# Altium PCB PCB.PcbDoc
Units mil, origin at the board's own origin, x right, y up, seen from the top; angles counter-clockwise.
Board outline 1900 x 1500 mil, 4 copper layers (Top Layer, Int1 (GND), Int2 (PWR), Bottom Layer), stack 62.449 mil thick; 52 components, 43 nets, 228 pads, 155 vias.
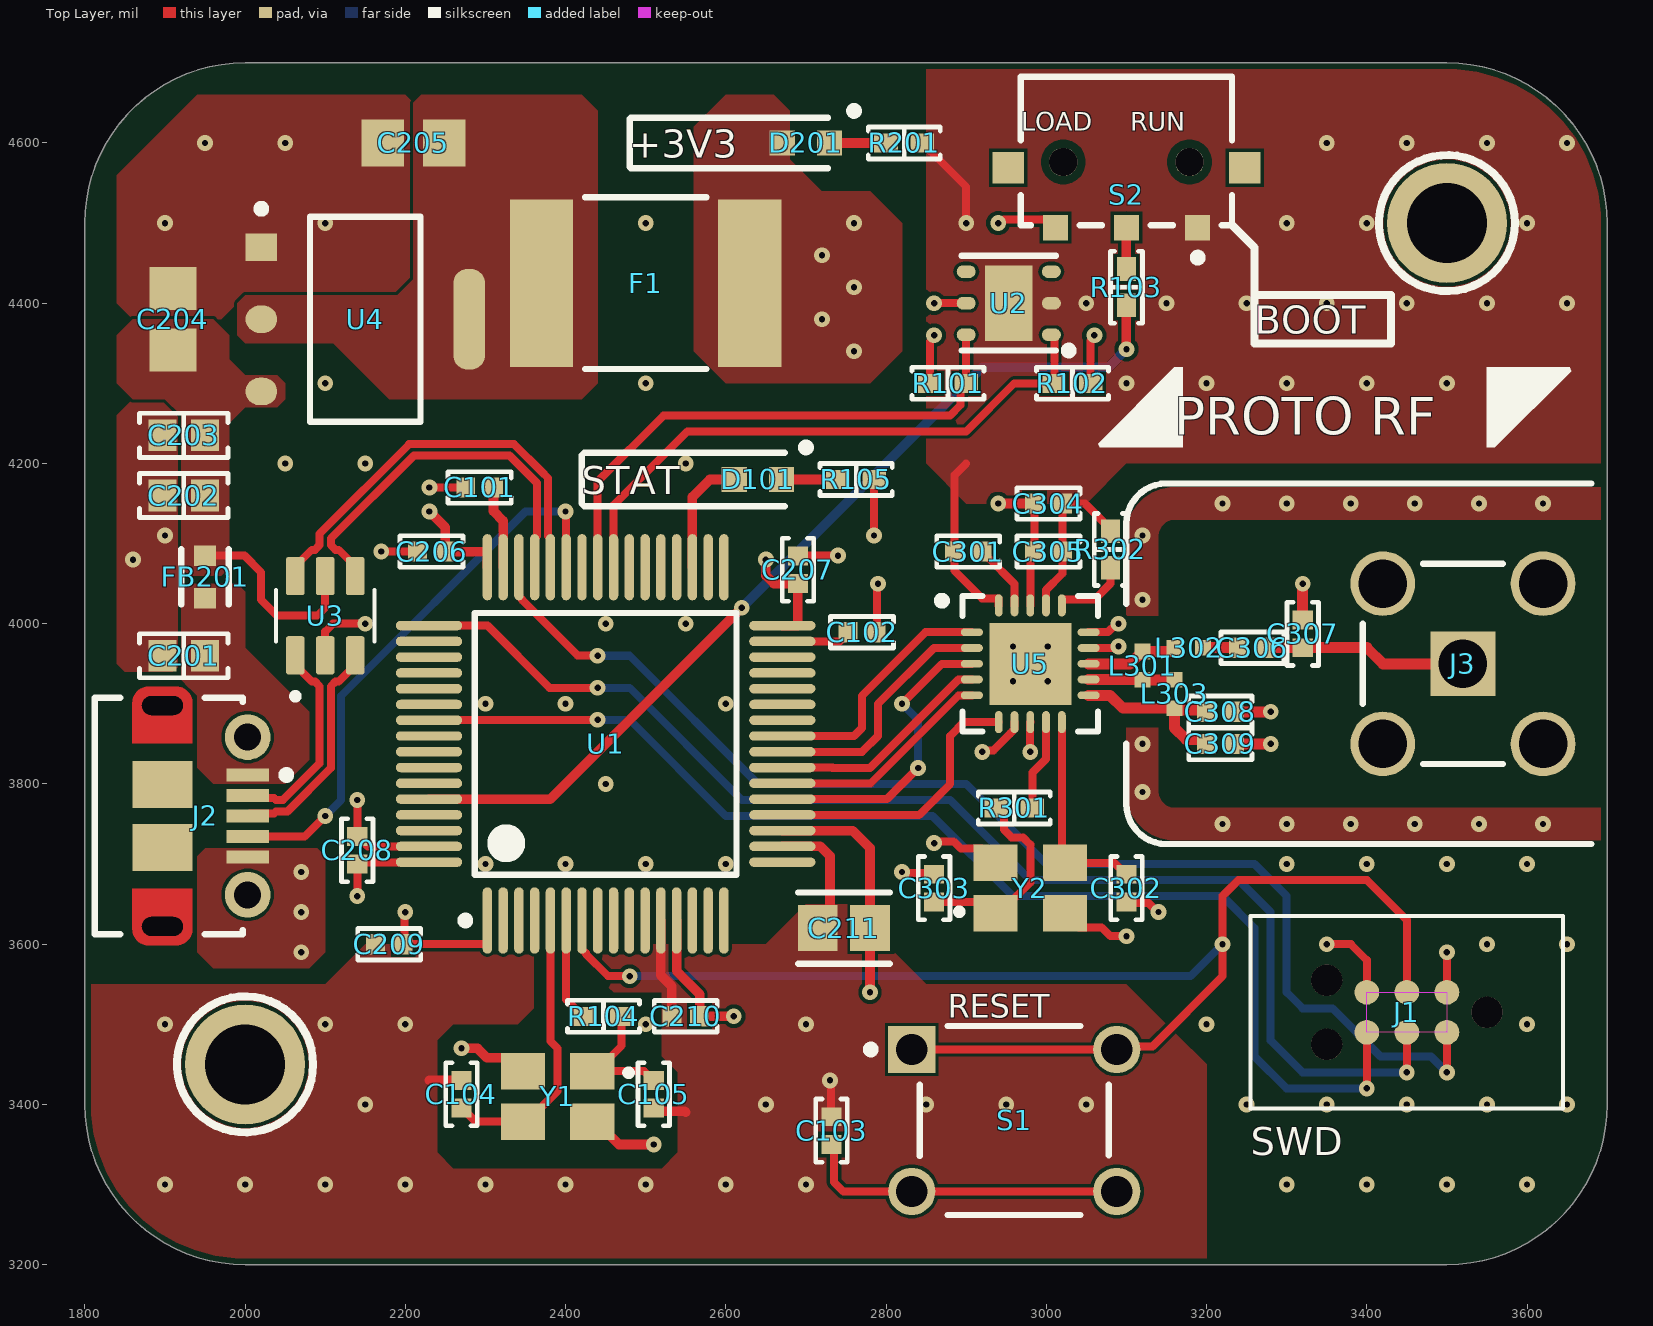
[diagram p0: Top Layer view]
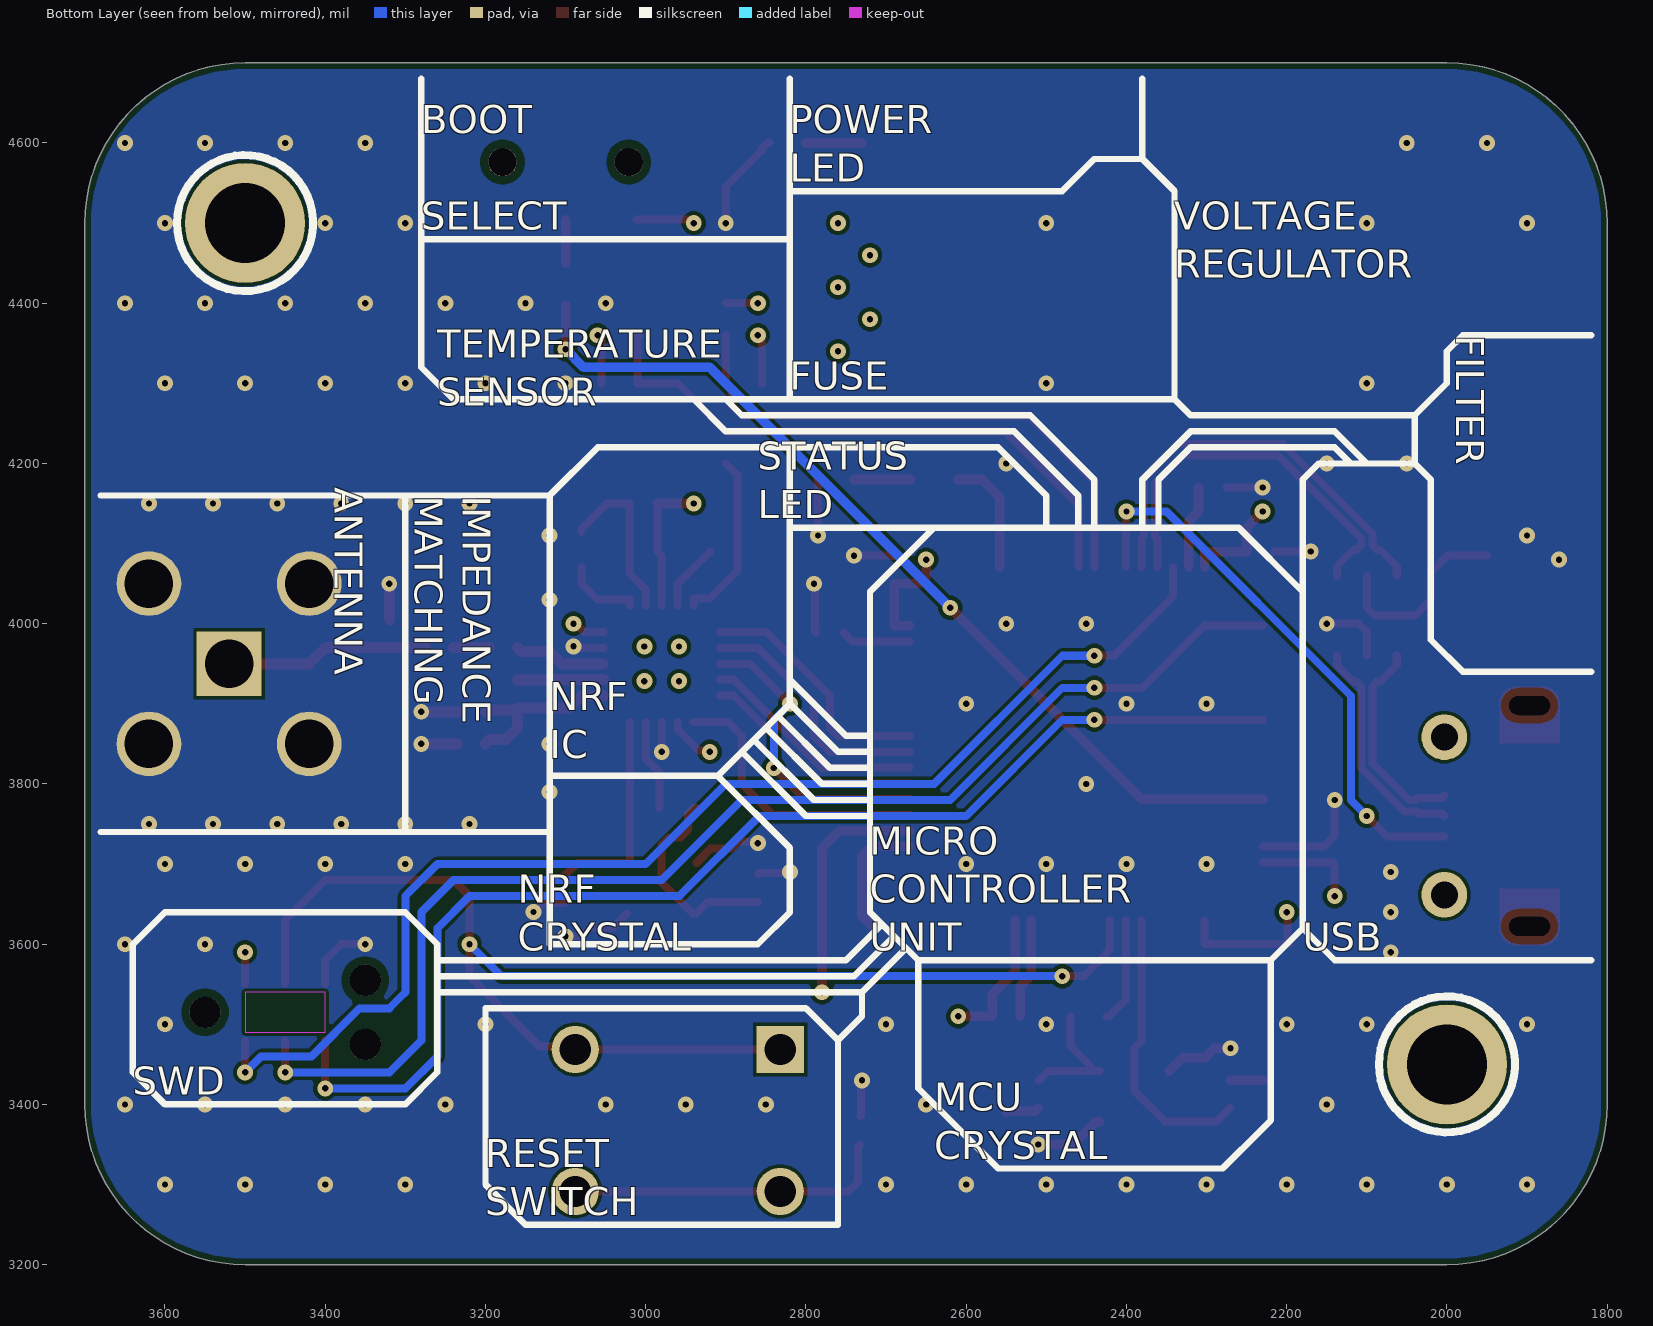
[diagram p1: Bottom Layer view, seen from below]
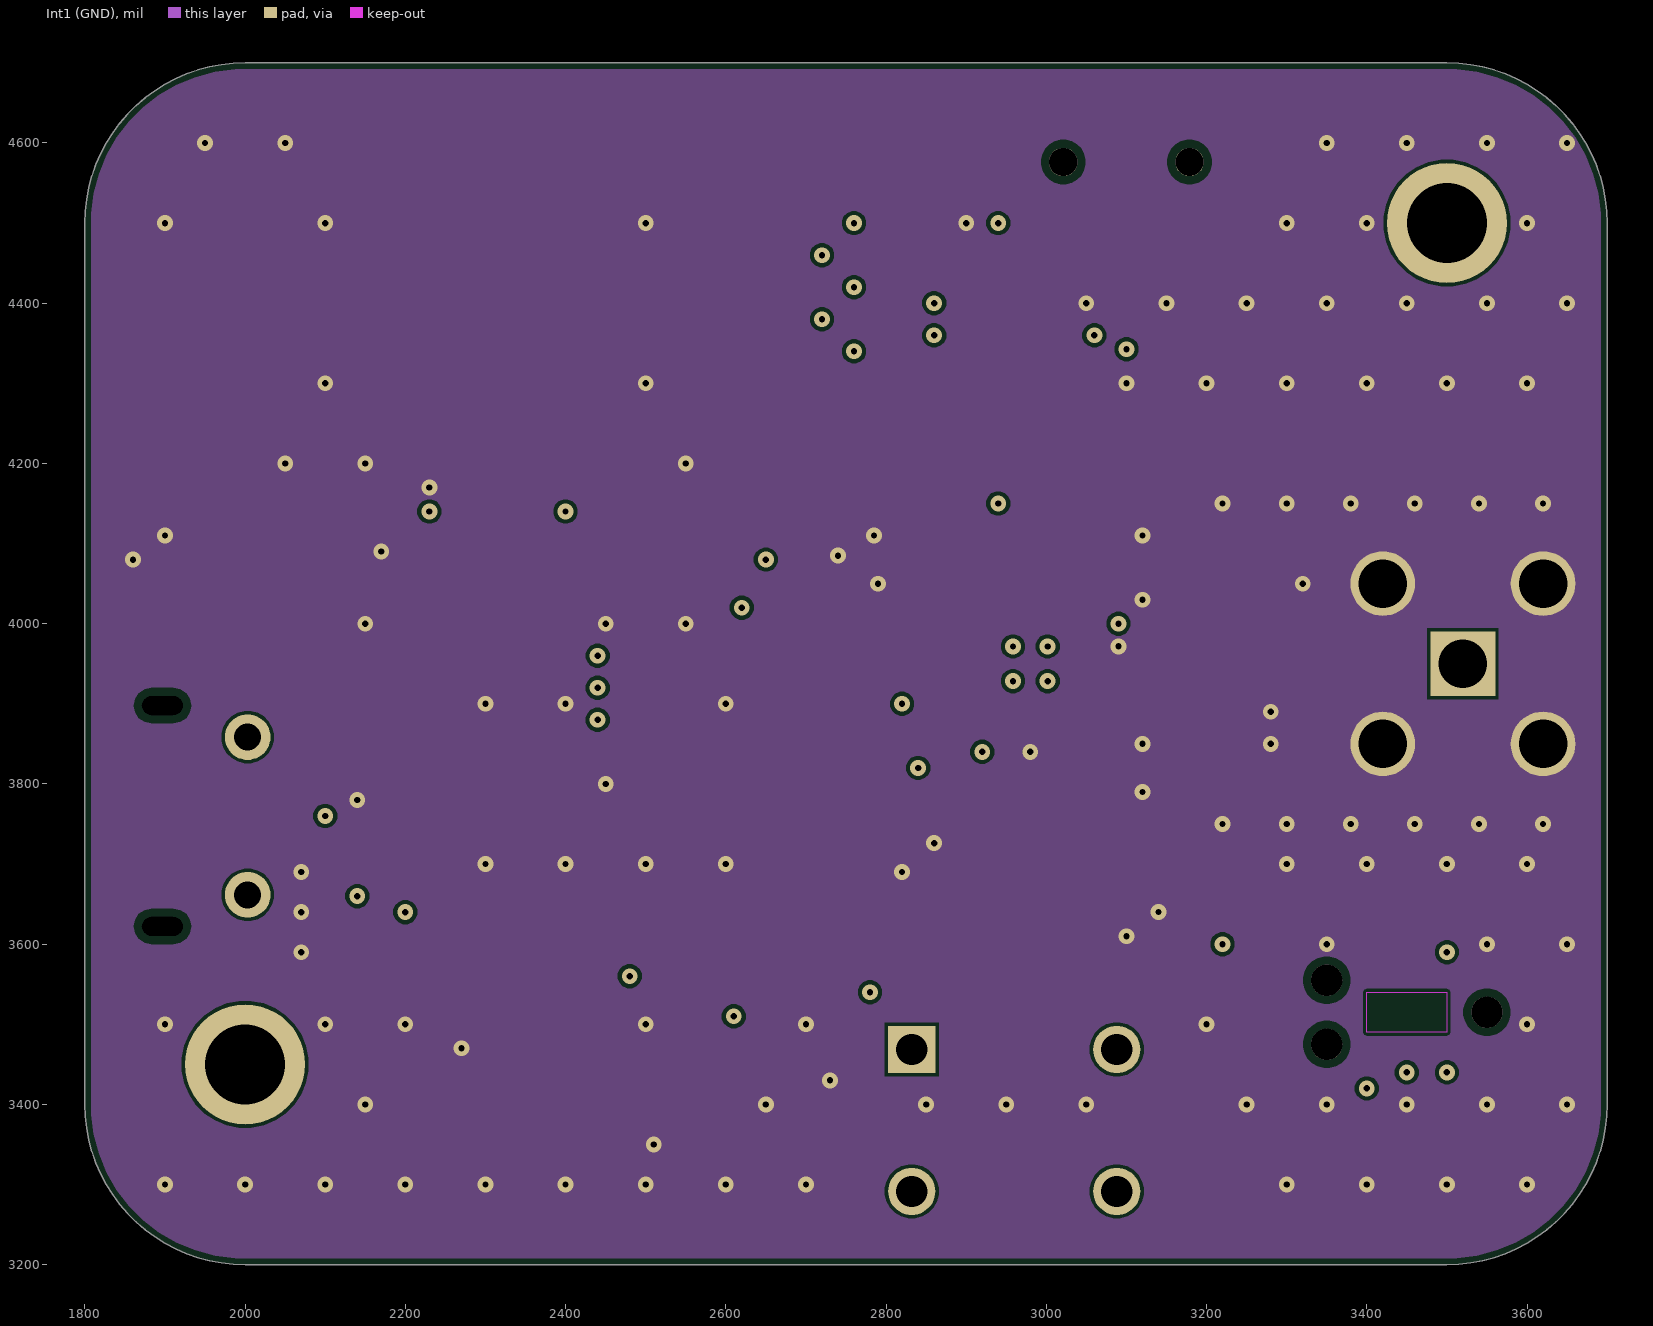
[diagram p2: Int1 (GND)]
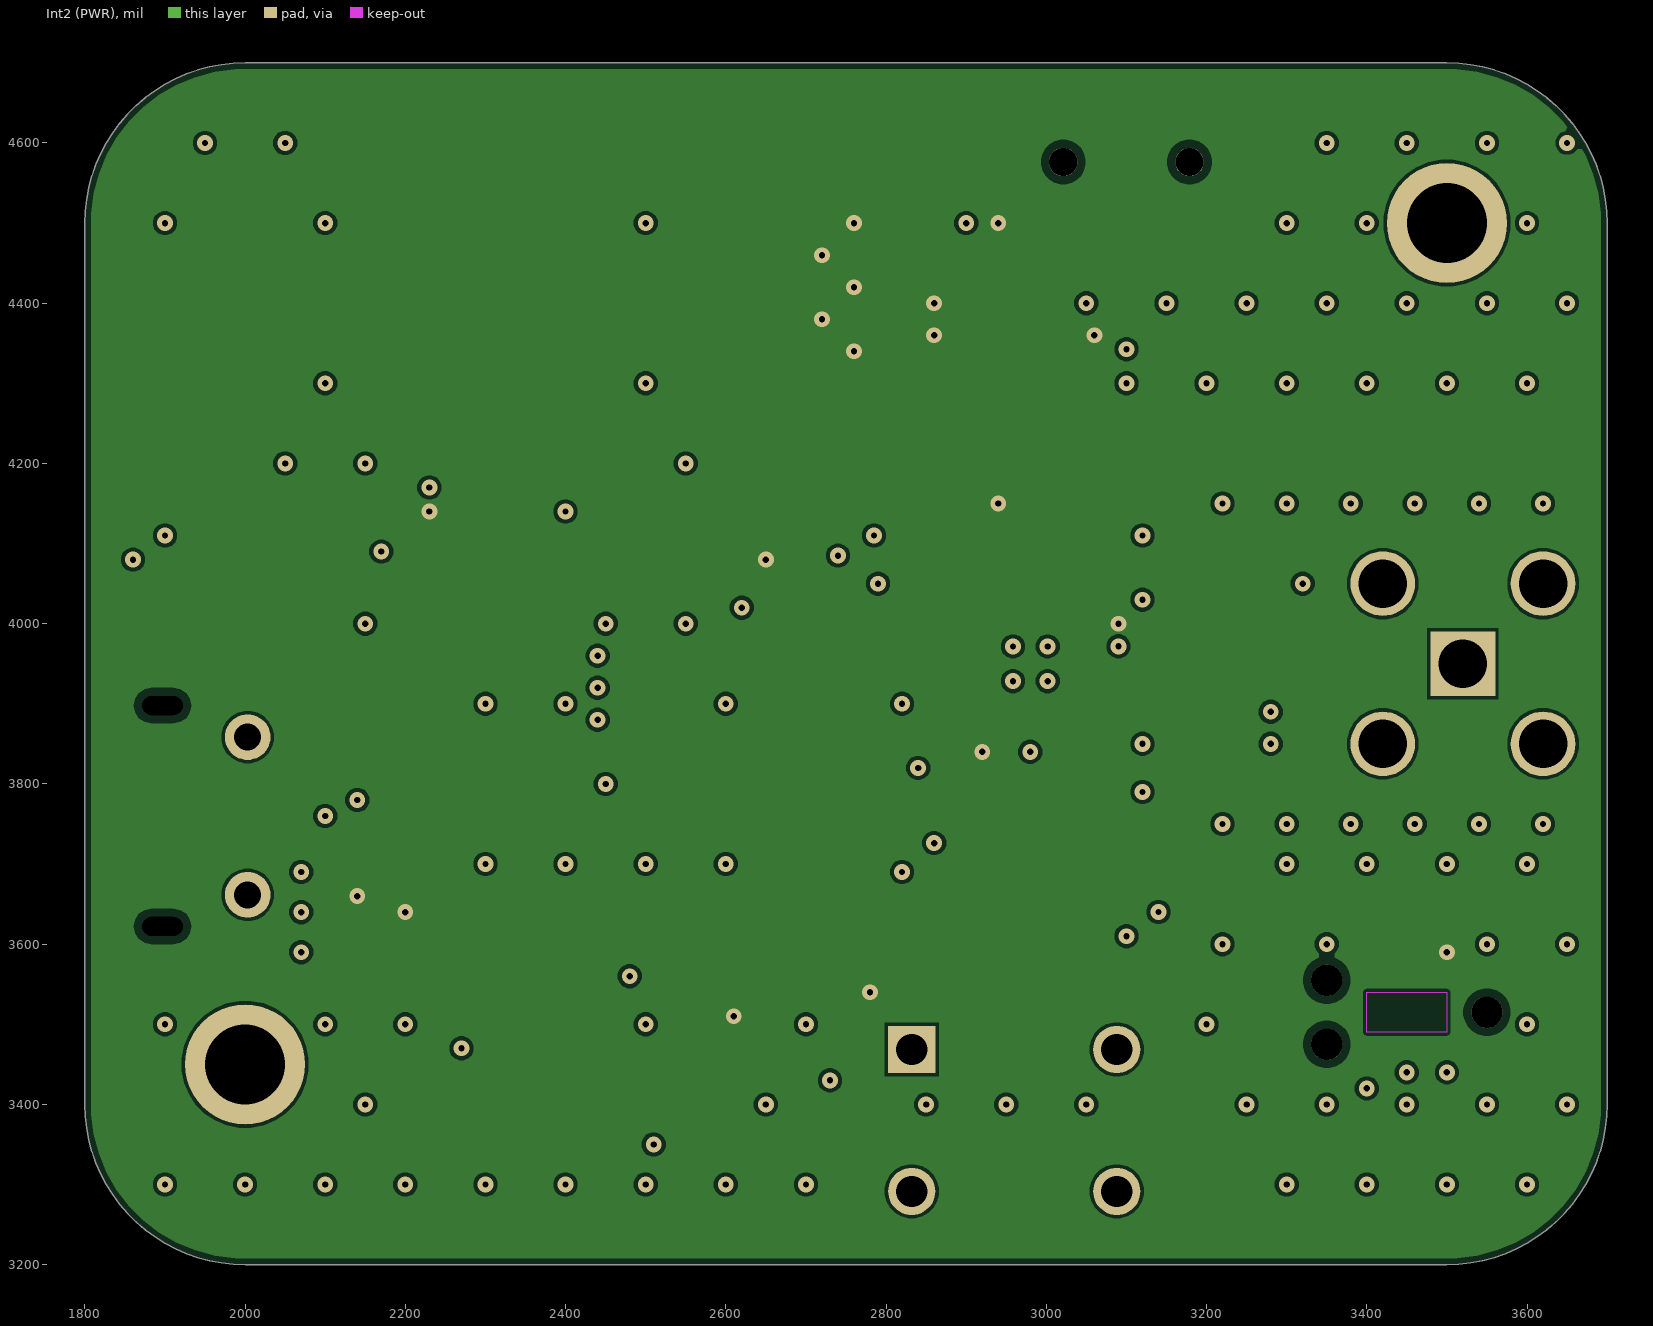
[diagram p3: Int2 (PWR)]

## Layer stack, top to bottom
Top Solder: solder mask 1, SM-001, Dk 4
Top Layer: signal copper 1.378
Dielectric 2: prepreg 8.284, PP-017, Dk 4.4
Int1 (GND): signal copper 0.598
Dielectric 3: core 41.929, Core-039, Dk 4.6
Int2 (PWR): signal copper 0.598
Dielectric 4: prepreg 8.284, PP-017, Dk 4.4
Bottom Layer: signal copper 1.378
Bottom Solder: solder mask 1, SM-001, Dk 4

## Board outline
2000,3200 cw(c2000,3400) 1800,3400 1800,4500 cw(c2000,4500) 2000,4700 3500,4700 cw(c3500,4500) 3700,4500 3700,3400 cw(c3500,3400) 3500,3200

## Design rules (kind name [scope] priority, off if disabled: settings)
BoardOutlineClearance [All] p1: gap=7.87 ignorepadtopadclearanceinfootprint=FALSE
Clearance [All] p1: gap=4 ignorepadtopadclearanceinfootprint=FALSE except(5: Arc-Via Track-Via SMDPad-Via THPad-Via Via-Via Via-Fill Via-Poly Via-Region Via-Text; 9.84: Arc-Hole Track-Hole SMDPad-Hole THPad-Hole Via-Hole Fill-Hole Poly-Hole Region-Hole Text-Hole)
ComponentClearance [All] p1: gap=4 collisioncheckmode=3 verticalgap=4 showdistances=TRUE
DiffPairsRouting [All] p1: maxlimit=4 minlimit=4 mostfreqgap=4 toplayer_minwidth=4 toplayer_maxwidth=71497.94 toplayer_prefwidth=4 midlayer1_minwidth=4 midlayer1_maxwidth=71497.94 midlayer1_prefwidth=4 midlayer2_minwidth=4 midlayer2_maxwidth=71497.94 midlayer2_prefwidth=4 bottomlayer_minwidth=4 bottomlayer_maxwidth=71497.94 bottomlayer_prefwidth=4 maxuncoupledlength=500
Height [All] p1: minheight=0 maxheight=71497.94 prefheight=500
HoleSize [All] p1: absolutevalues=TRUE maxlimit=248.03 minlimit=7.87 maxpercent=80.000 minpercent=20.000
HoleToHoleClearance [All] p1: gap=9.84 allowstackedmicrovias=FALSE
MinimumAnnularRing [All] p1: minimumring=3
MinimumSolderMaskSliver [All] p1: minsoldermaskwidth=0
PlaneClearance [All] p1: clearance=4
PlaneConnect PlaneConnectPowerPads [InPadClass('PowerPads')] p1: planeconnectstyle=Direct reliefexpansion=20 reliefentries=4 reliefconductorwidth=10 reliefairgap=10
PlaneConnect [All] p2: pad.planeconnectstyle=Relief pad.reliefexpansion=11.81 pad.reliefentries=4 pad.reliefconductorwidth=4 pad.reliefairgap=4 via.planeconnectstyle=Direct via.reliefexpansion=11.81 via.reliefentries=4 via.reliefconductorwidth=5 via.reliefairgap=5
PolygonConnect PolygonConnectPowerPads [All vs (InPadClass('PowerPads'))] p1: connectstyle=Direct reliefconductorwidth=10 reliefentries=4 polygonreliefangle="90 Angle" airgapwidth=10
PolygonConnect [All] p2: connectstyle=Direct reliefconductorwidth=4 reliefentries=4 polygonreliefangle="90 Angle" airgapwidth=4
RoutingVias [All] p1: holewidth=7.87 width=17.72 viastyle="Through Hole" minholewidth=7.87 minwidth=17.72 maxholewidth=248.03 maxwidth=257.87
SilkToSilkClearance [All] p1: silktosilkclearance=0
SilkToSolderMaskClearance [IsPad] p1: minsilkscreentomaskgap=4 clearancetoexposedcopper=TRUE
SolderMaskExpansion "Tented Via" [IsVia] p1: expansion=4 istentingtop=TRUE
SolderMaskExpansion [All] p2: expansion=2.95 istentingtop=FALSE
Width [All] p1: maxlimit=71497.94 minlimit=4 preferedwidth=4
20 further rules are at their usual default settings.

## Classes and differential pairs
component class RF: C301 C302 C303 C304 C305 C306 C307 C308 C309 J3 L301 L302 L303 R301 R302 U5 Y2
component class POWER: C201 C202 C203 C204 C205 C206 C207 C208 C209 C210 C211 D201 F1 FB201 R201 U4
net class "90 Ohm": USB_D_N USB_D_P
component class "MCU + SENSORS": C101 C102 C103 C104 C105 D101 J1 J2 R101 R102 R103 R104 R105 S1 S2 U1 U2 U3 Y1
differential pair USB_D: +USB_D_P -USB_D_N
differential pair USB_D_ESD: +USB_D_ESD_P -USB_D_ESD_N

## Components (designator, comment, footprint, x,y, rotation, side; value= is the part's Value field where it differs from the comment)
C101 "100n" "CAP 0402_1005" 2292.68,4170 r0 top
C102 "100n" "CAP 0402_1005" 2770,3989.21 r180 top
C103 "100n" "CAP 0402_1005" 2732.01,3367.32 r270 top
C104 "14p" "CAP 0402_1005" 2270,3412.68 r90 top
C105 "14p" "CAP 0402_1005" 2510,3412.68 r270 top
C201 "10n" "CAP 0603_1608" 1923.43,3960 r0 top
C202 "100n" "CAP 0603_1608" 1923.43,4160 r0 top
C203 "4u7" "CAP 0603_1608" 1923.43,4235 r0 top
C204 "T529P226M010AAE200" CAPC2013X100X55ML10T10 1910,4380 r270 top
C205 "T529P226M010AAE200" CAPC2013X100X55ML10T10 2210,4600 r0 top
C206 "100n" "CAP 0402_1005" 2232.68,4090 r0 top
C207 "100n" "CAP 0402_1005" 2690,4067.32 r270 top
C208 "100n" "CAP 0402_1005" 2140,3717.32 r270 top
C209 "100n" "CAP 0402_1005" 2180,3600 r0 top
C210 "100n" "CAP 0402_1005" 2550,3510 r0 top
C211 "10u" FP-GRM21B-0_2-e0_2_0_7-IPC_B 2747.49,3620 r180 top
C301 "33n" "CAP 0402_1005" 2902.68,4090 r0 top
C302 "14p" "CAP 0402_1005" 3100,3670 r270 top
C303 "14p" "CAP 0402_1005" 2860,3670 r90 top
C304 "10n" "CAP 0402_1005" 3002.68,4150 r180 top
C305 "1n" "CAP 0402_1005" 3002.68,4090 r180 top
C306 "1p5" "CAP 0402_1005" 3257.32,3970 r180 top
C307 "1p" "CAP 0402_1005" 3320,3987.32 r270 top
C308 "2n2" "CAP 0402_1005" 3217.32,3890 r180 top
C309 "4p7" "CAP 0402_1005" 3217.32,3850 r180 top
D101 "LTST-C190GKT" FP-LTST-C190GKT-MFG 2640,4180 r180 top
D201 "LTST-C191KSKT" FP-LTST-C191KSKT-MFG 2700,4600 r180 top
F1 "TLC-LSMD050" FP-2920L-MFG 2500,4425 r180 top value=0.015-0.048Ω
FB201 "BLM18SG331TN1D" FP-BLM18-0_15-t0_5-MFG 1950,4058.43 r90 top
J1 "TC2030-IDC-NL" TAG_TC2030-IDC-NL 3450,3515 r180 top
J2 "105017-0001" USB-MICRO-B_V 1950,3760 r270 top
J3 "731000114" MOLX-731000114_V 3520,3950 r180 top
L301 "8n2" WE-TCI_0402 3120,3947.72 r90 top
L302 "3n9" WE-TCI_0402 3177.72,3970 r0 top
L303 "2n7" WE-TCI_0402 3160,3912.28 r270 top
R101 "1K8" "RES 0402_1005" 2877.36,4300 r180 top
R102 "1K8" "RES 0402_1005" 3032.64,4300 r0 top
R103 "10K" "RES 0402_1005" 3100,4420 r90 top
R104 "0R" "RES 0402_1005" 2447.36,3510 r0 top
R105 "220" "RES 0402_1005" 2762.64,4180 r0 top
R201 "220" "RES 0402_1005" 2822.64,4600 r0 top
R301 "0R" "RES 0402_1005" 2960,3770 r0 top
R302 "22K" "RES 0402_1005" 3080,4092.64 r90 top
S1 "1825910-6" TECO-1825910-6_V 2960,3380 r0 top
S2 "JS102000SAQN" FP-JS102000SAQN-MFG 3100,4590 r180 top
U1 "STM32F405RGT6" STM-LQFP64_M 2450,3850 r90 top
U2 "HPP845E031R4" "TE HPP845E031R4" 2953.15,4400 r180 top
U3 "USBLC6-2SC6" SOT95P280X145-6N 2100,4010 r90 top
U4 "AMS1117-3.3" FP-AMS1117-IPC_C 2150,4380 r0 top
U5 "NRF24L01P-T" NRSC-QFN-20_L 2980,3950 r0 top
Y1 "830108207109" WE-XTAL_CFPX-180 2390,3410 r180 top
Y2 "830108207109" WE-XTAL_CFPX-180 2980,3670 r0 top

## Footprints (in the part's own frame and the unit in brackets; to place one, negate y for a bottom-side part, rotate by r counter-clockwise, add the part's x,y. Pads: shape width x height; smd on the part's side, far side on the other; paste and mask are expansions set on the pad)
"CAP 0402_1005" [mm] "Chip Capacitor, 2-Leads, Body 1.02x0.51mm, IPC Medium Density"
  rect 0.6x0.64 smd: 1(-0.44,0) 2(0.44,0)
  silkscreen extent -1,-0.5 1,0.5, body extent -0.5,-0.26 0.5,0.26, height 0.52
"CAP 0603_1608" [mm] "Chip Capacitor, 2-Leads, Body 1.60x0.80mm, IPC Medium Density"
  rect 0.9x1 smd: 1(-0.675,0) 2(0.675,0)
  silkscreen extent -1.4,-0.7 1.4,0.7, body extent -0.8,-0.41 0.8,0.41, height 0.82
CAPC2013X100X55ML10T10 [mm] "Chip Capacitor, 2-Leads, Body 2.00x1.25mm, IPC Low Density"
  rect 1.35x1.5 smd: 1(-0.975,0) 2(0.975,0)
  body extent -1.05,-0.67 1.05,0.67, height 1
FP-2920L-MFG [mm]
  rect 2x5.3 smd paste+0 mask+0: 1(-3.3,0) 2(3.3,0)
  silkscreen extent -1.92,-2.72 1.92,2.72, body extent -4.4,-2.82 4.4,2.82, height 0.25
FP-AMS1117-IPC_C [mm]
  rect 1.004x0.872 smd paste+0 mask+0: 1(-3.295,2.29)
  rrect100% 1.004x0.872 smd paste+0 mask+0: 2(-3.295,0) 3(-3.295,-2.29)
  rrect87% 1.004x3.182 smd paste+0 mask+0: 4(3.295,0)
  silkscreen extent -3.42,-3.25 1.75,3.62, body extent -3.9,-3.35 3.9,3.35, height 0.25
FP-BLM18-0_15-t0_5-MFG [mm]
  rect 0.65x0.7 smd paste+0 mask+0: 1(-0.675,0) 2(0.675,0)
  silkscreen extent -0.87,-0.75 0.87,0.75, body extent -1.1,-0.58 1.1,0.58, height 0.25
FP-GRM21B-0_2-e0_2_0_7-IPC_B [mil]
  rect 49.4x57.33 smd paste+0 mask+0: 1(-32.51,0) 2(32.51,0)
  silkscreen extent -57,-44 57,44, body extent -67,-39 67,39, height 10
FP-JS102000SAQN-MFG [mm]
  rect 0.8x0.8 smd paste+0 mask+0: 1(-2.25,2.43) 2(0,2.43) 3(2.25,2.43)
  rect 1x1 smd paste+0 mask+0: 4(-3.75,0.53) 5(3.75,0.53)
  round 0.9 hole 0.9 unplated paste-1000 mask+0: ""(-2,0.35) ""(2,0.35)
  silkscreen extent -3.35,-2.35 3.35,3.5, body extent -4.35,-2.45 4.35,2.93, height 0.25
FP-LTST-C190GKT-MFG [mm]
  rect 0.8x0.8 smd paste+0 mask+0: 1(-0.75,0) 2(0.75,0)
  silkscreen extent -1.65,-1.14 0.85,0.85, body extent -1.25,-0.55 1.25,0.55, height 0.25
FP-LTST-C191KSKT-MFG [mm]
  rect 0.8x0.8 smd paste+0 mask+0: 1(-0.75,0) 2(0.75,0)
  silkscreen extent -1.65,-1.14 0.7,0.8, body extent -1.25,-0.55 1.25,0.55, height 0.25
MOLX-731000114_V [mm] "Connector, 5-Leads, Body 14.8x6.35mm, Pitch 2.54mm"
  rect 2.05x2.05 hole 1.54: 1(0,0)
  round 2.05 hole 1.54: 2(-2.54,2.54) 3(-2.54,-2.54) 4(2.54,-2.54) 5(2.54,2.54)
  silkscreen extent -1.26,-3.17 3.17,3.17, body extent -11.62,-3.17 3.18,3.18, height 9.57
NRSC-QFN-20_L [mm] "QFN, 20-Leads, Body 4x4mm, Pitch 0.5mm, Thermal Pad 2.6x2.6mm, IPC High Density"
  oval 0.7x0.25 smd: 1(-1.85,1) 2(-1.85,0.5) 3(-1.85,0) 4(-1.85,-0.5) 5(-1.85,-1) 11(1.85,-1) 12(1.85,-0.5) 13(1.85,0) 14(1.85,0.5) 15(1.85,1)
  oval 0.25x0.7 smd: 6(-1,-1.85) 7(-0.5,-1.85) 8(0,-1.85) 9(0.5,-1.85) 10(1,-1.85) 16(1,1.85) 17(0.5,1.85) 18(0,1.85) 19(-0.5,1.85) 20(-1,1.85)
  rect 2.6x2.6 smd: 21(0,0)
  silkscreen extent -2.92,-2.15 2.15,2.15, body extent -2,-2 2,2, height 0.95
"RES 0402_1005" [mm] "Chip Resistor, 2-Leads, Body 1.0x0.5mm, IPC Medium Density"
  rect 0.75x0.6 smd: 1(-0.575,0) 2(0.575,0)
  silkscreen extent -1.14,-0.51 1.14,0.51, body extent -0.5,-0.25 0.5,0.25, height 0.35
SOT95P280X145-6N [mm]
  rrect25% 1.21x0.59 smd: 1(-1.255,0.95) 2(-1.255,0) 3(-1.255,-0.95) 4(1.255,-0.95) 5(1.255,0) 6(1.255,0.95)
  silkscreen extent -2.65,-1.57 0.81,1.57, body extent -1.4,-1.46 1.4,1.46, height 0.4
STM-LQFP64_M [mm] "Thin QFP, 64-Leads, Body 10x10mm, Pitch 0.5mm, IPC Low Density"
  oval 2.1x0.3 smd: 1(-5.6,3.75) 2(-5.6,3.25) 3(-5.6,2.75) 4(-5.6,2.25) 5(-5.6,1.75) 6(-5.6,1.25) 7(-5.6,0.75) 8(-5.6,0.25) 9(-5.6,-0.25) 10(-5.6,-0.75) 11(-5.6,-1.25) 12(-5.6,-1.75) 13(-5.6,-2.25) 14(-5.6,-2.75) 15(-5.6,-3.25) 16(-5.6,-3.75) 33(5.6,-3.75) 34(5.6,-3.25) 35(5.6,-2.75) 36(5.6,-2.25) 37(5.6,-1.75) 38(5.6,-1.25) 39(5.6,-0.75) 40(5.6,-0.25) 41(5.6,0.25) 42(5.6,0.75) 43(5.6,1.25) 44(5.6,1.75) 45(5.6,2.25) 46(5.6,2.75) 47(5.6,3.25) 48(5.6,3.75)
  oval 0.3x2.1 smd: 17(-3.75,-5.6) 18(-3.25,-5.6) 19(-2.75,-5.6) 20(-2.25,-5.6) 21(-1.75,-5.6) 22(-1.25,-5.6) 23(-0.75,-5.6) 24(-0.25,-5.6) 25(0.25,-5.6) 26(0.75,-5.6) 27(1.25,-5.6) 28(1.75,-5.6) 29(2.25,-5.6) 30(2.75,-5.6) 31(3.25,-5.6) 32(3.75,-5.6) 49(3.75,5.6) 50(3.25,5.6) 51(2.75,5.6) 52(2.25,5.6) 53(1.75,5.6) 54(1.25,5.6) 55(0.75,5.6) 56(0.25,5.6) 57(-0.25,5.6) 58(-0.75,5.6) 59(-1.25,5.6) 60(-1.75,5.6) 61(-2.25,5.6) 62(-2.75,5.6) 63(-3.25,5.6) 64(-3.75,5.6)
  silkscreen extent -5.72,-4.15 4.15,4.57, body extent -5,-5 5,5, height 1.6
TAG_TC2030-IDC-NL [mil]
  round 30.98 smd paste-39.37: 1(-50,-25) 2(-50,25) 3(0,-25) 4(0,25) 5(50,-25) 6(50,25)
  round 39.02 hole 39.02 unplated: ""(-100,0) ""(100,-40) ""(100,40)
  Keep-Out Layer region: 50,-25.03 -50.06,-25.03 -50.06,25 50,25
  silkscreen extent -195,-120 195,120
"TE HPP845E031R4" [mm] "SMT, 6-Leads, Body 3.0x3.0mm, Pitch 1.0mm, IPC Medium Density"
  oval 0.6x0.4 smd: 1(-1.35,1) 2(-1.35,0) 3(-1.35,-1) 5(1.35,0) 6(1.35,1)
  oval 0.6x0.4 smd paste+0: 4(1.35,-1)
  rect 1.5x2.4 smd: 7(0,0)
  silkscreen extent -2.02,-1.5 1.5,1.62, body extent -1.5,-1.5 1.5,1.5, height 0.9
TECO-1825910-6_V [mm] "Switch, 4-Leads, Body 5.99x5.99mm"
  rect 1.5x1.5 hole 0.99: 1(-3.25,2.25)
  round 1.5 hole 0.99: 2(3.25,2.25) 3(-3.25,-2.25) 4(3.25,-2.25)
  silkscreen extent -4.67,-2.99 2.99,3, body extent -3,-2.99 2.99,3, height 5
USB-MICRO-B_V [mm] "USB, MICRO B, Body 7.491x4.695 mm, Pitch 0.65 mm"
  rect 0.4x1.35 smd: 1(-1.3,1.35) 2(-0.65,1.35) 3(0,1.35) 4(0.65,1.35) 5(1.3,1.35)
  round 1.45 hole 0.85: 6(-2.5,1.35) 7(2.5,1.35)
  rrect50% 0x0 hole 0.6 slot 1.3 at 90 deg: 8(-3.5,-1.35) 11(3.5,-1.35)
  rect 1.5x1.9 smd: 9(-1,-1.35) 10(1,-1.35)
  Top Layer circle w0.5: c-3.6,-1.8 r0.25
  Top Layer circle w0.5: c-3.6,-0.9 r0.25
  Top Layer circle w0.5: c3.6,-1.8 r0.25
  Top Layer circle w0.5: c3.6,-0.9 r0.25
  Top Layer region: -3.6,-1.8 -3.6,-0.9 -4.1,-0.9 -4.1,-1.8
  Top Layer region: 3.6,-0.9 3.6,-1.8 4.1,-1.8 4.1,-0.9
  Top Layer region: 2.3,-0.4 2.3,-2.3 3.6,-2.3 3.6,-0.4
  Top Layer region: -2.3,-2.3 -2.3,-0.4 -3.6,-0.4 -3.6,-2.3
  silkscreen extent -3.75,-3.5 3.75,2.7, body extent -4.1,-3.9 4.1,1.5, height 2.67
WE-TCI_0402 [mm] "Thinfilm Chip Inductor, 2-leads, body 1.00x0.50mm"
  rect 0.5x0.5 smd: 1(-0.45,0) 2(0.45,0)
  body extent -0.5,-0.25 0.5,0.25, height 0.32
WE-XTAL_CFPX-180 [mm] "Quartz Crystal, size CFPX-180, body 3.4x2.7mm"
  rect 1.4x1.15 smd: 1(-1.1,-0.8) 2(1.1,-0.8) 3(1.1,0.8) 4(-1.1,0.8)
  silkscreen extent -2.35,-0.85 -2.15,-0.65, body extent -1.7,-1.35 1.7,1.35, height 0.65

## Part data
C101 C102 C206 C207 C208 C209 C210: library part CL05B104KP5VPNC, "CAP CER 100NF 10V X7R 0402", Capacitance="0.1 µF", Device Package="0402 (1005 Metric)", manufacturer="Samsung Electro-Mechanics", Operating Temperature="-55°C ~ 125°C", Ratings=AEC-Q200, Supplier Part Number 1=1276-CL05B104KP5VPNCCT-ND, Temperature Coefficient=X7R, Tolerance=±10%, Voltage - Rated=10V, Applications=Automotive, componentlink1description=Datasheet, componentlink1url=https://mm.digikey.com/Volume0/opasdata/d220001/medias/docus/5458/CL05B104KP5VPNC_Spec.pdf, componentlink2description="DigiKey Link", componentlink2url=https://www.digikey.com/en/products/detail/samsung-electro-mechanics/CL05B104KP5VPNC/20498482, lastupdated="29/01/2024 8:03:07 PM", Lifecycle Status=Active, Minimum Order=1, Mounting Type="Surface Mount, MLCC", Package / Case="0402 (1005 Metric)", packaging=TapeAndReel, Part Number=CL05B104KP5VPNC, partid=56690, price=0.01, series=CL, Size / Dimension="0.039\" L x 0.020\" W (1.00mm x 0.50mm)", Supplier 1=DigiKey, Thickness (Max)="0.022\" (0.55mm)"
C103: library part CL05B104KP5VPNC, "CAP CER 100NF 10V X7R 0402", Part Number=CL05B104KP5VPNC
C104 C105 C302 C303: library part GJM1555C1H140GB01D, "CAP CER 14PF 50V C0G/NP0 0402", Part Number=GJM1555C1H140GB01D
C201 C202 C203: library part CL10A226MPCNUBE, "CAP CER 22UF 10V X5R 0603", Part Number=CL10A226MPCNUBE
C204 C205: library part CMP-2007-03671-1, manufacturer=Kemet, Part Number=T529P226M010AAE200
C211: library part CMP-06035-047417-1, "Chip Multilayer Ceramic Capacitors for General Purpose, 0805, 10uF, X7R, 15%, 10%, 25V"
C301: library part C0402C330J4RACAUTO, "CAP CER 33PF 16V X7R 0402", Capacitance="33 pF", Device Package="0402 (1005 Metric)", manufacturer=KEMET, Operating Temperature="-55°C ~ 125°C", Ratings=AEC-Q200, Supplier Part Number 1=399-13708-1-ND, Temperature Coefficient=X7R, Tolerance=±5%, Voltage - Rated=16V, Applications="Automotive, Bypass, Decoupling", componentlink1description=Datasheet, componentlink1url=https://api.kemet.com/component-edge/download/datasheet/C0402C330J4RACAUTO.pdf, componentlink2description="DigiKey Link", componentlink2url=https://www.digikey.com/en/products/detail/kemet/C0402C330J4RACAUTO/6219618, lastupdated="23/01/2024 8:04:40 PM", Lifecycle Status=Active, Minimum Order=1, Mounting Type="Surface Mount, MLCC", Package / Case="0402 (1005 Metric)", packaging=TapeAndReel, Part Number=C0402C330J4RACAUTO, Part Status=Active, partid=1721, price=0.01, series="SMD Auto X7R", Size / Dimension="0.039\" L x 0.020\" W (1.00mm x 0.50mm)", Supplier 1=DigiKey, Thickness (Max)="0.022\" (0.55mm)"
C304 C305 C306 C307 C308 C309: library part C0402C103K4REC7867, "CAP CER 0402 10NF 16V X7R 10%", Capacitance="10000 pF", Device Package="0402 (1005 Metric)", manufacturer=KEMET, Operating Temperature="-55°C ~ 125°C", Supplier Part Number 1=399-C0402C103K4REC7867CT-ND, Temperature Coefficient=X7R, Tolerance=±10%, Voltage - Rated=16V, Applications="ESD Protection", componentlink1description=Datasheet, componentlink1url=https://connect.kemet.com:7667/gateway/IntelliData-ComponentDocumentation/1.0/download/datasheet/C0402C103K4REC7867, componentlink2description="DigiKey Link", componentlink2url=https://www.digikey.com/en/products/detail/kemet/C0402C103K4REC7867/8643577, lastupdated="23/01/2024 8:03:47 PM", Lifecycle Status=Active, Minimum Order=1, Mounting Type="Surface Mount, MLCC", Package / Case="0402 (1005 Metric)", packaging=TapeAndReel, Part Number=C0402C103K4REC7867, Part Status=Active, partid=52124, price=0.01, series="ESD SMD Comm X7R", Size / Dimension="0.039\" L x 0.020\" W (1.00mm x 0.50mm)", Supplier 1=DigiKey, Thickness (Max)="0.022\" (0.55mm)"
D101: library part CMP-22017-000005-2, "LED GREEN CLEAR CHIP SMD", Case Code (Imperial)=0603, Case Code (Metric)=1608, Color=Green, Forward Current=30mA, Forward Voltage=2.1V, Lens Color=Colorless, Max Operating Temperature=85°C, Min Operating Temperature=-55°C, Package Quantity=1, Power Dissipation=100mW, Reverse Voltage=5V, Test Current=10mA, Voltage=2V, Case/Package=0603, Depth=0.8mm, Dominant Wavelength=569nm, Height=0.8mm, Illumination Color=Green, Lead Free="Lead Free", Length=1.6mm, Lens Style=Clear, Lens Transparency=Clear, Luminous Intensity=6mcd, Mount="Surface Mount", Number of Elements=1, Number of LEDs=1, Number of Pins=2, packaging="Tape and Reel", Power Rating=100mW, Radiation Hardening=No, Viewing Angle=130°, Wavelength=565nm, Width=0.8mm
D201: library part CMP-22017-000025-1, "LED YELLOW CLEAR SMD", Case Code (Imperial)=0603, Case Code (Metric)=1608, Color=Yellow, Forward Current=30mA, Forward Voltage=2.4V, Lens Color=Colorless, Max Operating Temperature=85°C, Min Operating Temperature=-55°C, Package Quantity=1, Power Dissipation=75mW, Reverse Voltage=5V, Test Current=20mA, Case/Package=0603, Depth=0.8mm, Dominant Wavelength=597nm, Height=0.55mm, Illumination Color=Yellow, Lead Free="Lead Free", Length=1.6mm, Lens Style=Diffused, Lens Transparency=Clear, Luminous Intensity=180mcd, Mount="Surface Mount", Number of Elements=1, Number of LEDs=1, Number of Pins=2, packaging="Tape and Reel", Power Rating=75mW, Radiation Hardening=No, Viewing Angle=130°, Wavelength=588nm, Width=0.8mm
F1: library part CMP-2000-05550-2, "PTC RESET FUSE 15V 3A 2920", Ambient Temperature Range High=+85°C, Ambient Temperature Range Low=-40°C, Current Rating=40A, Hold Current=3A, manufacturer=Littelfuse, Manufacturer Part Number=2920L300/15DR, Package=2920L, Resistance=0.015-0.048Ω, Temperature="-40°C to +85°C", Trip Current=5A, Voltage Rating=15V, Automotive=No, Category=Fuse, componentlink2description=Datasheet, componentlink2url=https://m.littelfuse.com/~/media/electronics/datasheets/resettable_ptcs/littelfuse_ptc_2920l_datasheet.pdf.pdf, Device Class L1="Circuit Protection", Device Class L2="PTC Resettable Fuses", Device Class L3=unset, Digikey Description="PTC RESET FUSE 15V 3A 2920", Height=1.25mm, Lead Free=Yes, Octopart=https://octopart.com/2920l300%2F15dr-littelfuse-673797, RoHS=TRUE, Temperature Range High=+85°C, Temperature Range Low=-40°C, Trip Time=20s
FB201: library part CMP-0686-00608-3, "Chip Ferrite Bead, 0603, 330Ω @ 100MHz, 25%, 0.07Ω, 1.5A", Case Code (Imperial)=0603, Case Code (Metric)=1608, Current Rating=1.5A, DC Resistance (DCR)=70mR, Frequency=100MHz, Max Operating Temperature=125°C, Min Operating Temperature=-55°C, Package Quantity=1, Tolerance=25%, Case/Package=0603, Core Material=Ferrite, DC Resistance-Max=70mR, Depth=0.8mm, Height=0.8mm, Impedance=330R, Lead Free="Lead Free", Length=1.6mm, Material=Ferrite, Max Current Rating=1.5A, Max DC Current=1.5A, Number of Circuits=1, Number of Lines=1, Number of Pins=2, packaging="Tape and Reel", REACH SVHC="No SVHC", RoHS Compliant=Yes, series=BLM18S, Termination=SMD/SMT, Test Frequency=100MHz, Width=0.8mm
J1: "CABLE ADAPTER 6 POS", Package=None, Availability=Unavailable, MP=TC2030-IDC-NL, price=None
J2: library part CMP-2000-05827-1, "Micro-USB B Receptacle, Right Angle, Bottom Mount, Surface Mount, with Solder Tabs, -30 to 85 degC, 5-Pin USB, RoHS, Tape and Reel", manufacturer=Molex, Package Description="5-Leads USB, Micro B, Body 7.5 x 5 mm, Pitch 0.65 mm", Package Reference=MICRO-B, Package Version="Rev. F, 12/2012", Standard Package=1, Voltage - Max=30V, 3D Model=105017-0001.stp, Catalog Drawings=1050170001, Category=Connectors,Interconnects, Circuits=5, Connector Type=USB-microB, Datasheet URL=http://www.molex.com/elqNow/elqRedir.htm?ref=http://www.molex.com/webdocs/datasheets/pdf/en-us/1050170001_IO_CONNECTORS.pdf, Datasheet Version=03/2016, Family=USB,DVI,HDMIConnectors, Featured Product=Micro-USBConnectorsUSBConnectors, Features=Shielded,SolderRetention, Gender=Receptacle, Ingress Protection=-, Manufacturer URL=http://www.molex.com/, Mating Products=WM17145-ND-CABLEMICROUSBBTOSTDA1.0MWM17147-ND-CABLEMICROUSBBTOSTDA2.0MWM17146-ND-CABLEMICROUSBBTOSTDA1.5M, Mounting Technology=SurfaceMount, Mounting Type=BoardCutout,SurfaceMount,RightAngle, Number of Contacts=5, Online Catalog=Molex-MicroUSB, Other Names=WM1399DKR, Package URL=http://www.molex.com/pdm_docs/sd/1050170001_sd.pdf, packaging=Digi-Reel®, PCN Assembly/Origin=ResinSupplier21/Oct/2015, RoHS Information=1050170001CertofCompliance, series=-, Specifications=-
J3: library part CMP-2000-05487-1, "SMA Right-Angle PCB Jack Receptacle, Brass Body, Gold Plated, 50 Ohm, 5-Pin THD, RoHS, Tray", manufacturer=Molex, Package Description="5-Pin Through Hole Device, Body 14.8 x 6.35 mm, Pitch 2.54 mm", Datasheet URL=http://www.molex.com/webdocs/datasheets/pdf/en-us/0731000114_RF_COAX_CONNECTORS.pdf, Datasheet Version=09/2016, Manufacturer URL=http://www.molex.com/, Mounting Technology=ThroughHole, Package Reference=731000114, Package URL=http://www.molex.com/pdm_docs/sd/731000114_sd.pdf
L301 L302 L303: library part CMP-03913-14415878-1, "744901039 Fixed Ind 3.9NH 340MA 500MOHM Sm", Case Code (Imperial)=0402, Case Code (Metric)=1005, Current Rating=340mA, DC Resistance (DCR)=370mΩ, Inductance=3.9nH, Max Operating Temperature=125°C, Min Operating Temperature=-40°C, Self Resonant Frequency=6GHz, Test Frequency=500MHz, Case/Package=0402, Composition="Thin Film", Core Material=Alumina, Height=320µm, Height - Seated (Max)=406.4µm, Length=1mm, Max DC Current=340mA, Mount="Surface Mount", NexarPartId=14415878, Number of Pins=2, packaging=Digi-Reel®, Q Factor=13, REACH SVHC=Unknown, RoHS=Compliant, Shielding=Unshielded, Termination=SMD/SMT, Weight=652.039032µg, Width=500µm
R101 R102 R103 R105 R201: library part RP73PF1E10KBTD, "RES 10K OHM 0.1% 1/10W 0402", Part Number=RP73PF1E10KBTD
R104 R301: library part 5112, "0402 JUMPER ON TAPE AND REEL", Part Number=5112
R302: library part RC0402FR-0722K1L, "RES 22.1K OHM 1% 1/16W 0402", Device Package="0402 (1005 Metric)", manufacturer=Yageo, Operating Temperature="-55°C ~ 155°C", Power (Watts)="0.063W, 1/16W", Resistance="22.1 kOhms", Supplier Device Package=0402, Supplier Part Number 1=311-22.1KLRCT-ND, Temperature Coefficient=±100ppm/°C, Tolerance=±1%, componentlink1description=Datasheet, componentlink1url=https://www.yageo.com/upload/media/product/productsearch/datasheet/rchip/PYu-RC_Group_51_RoHS_L_10.pdf, componentlink2description="DigiKey Link", componentlink2url=https://www.digikey.com/en/products/detail/yageo/RC0402FR-0722K1L/726563, Composition="Thick Film", Features="Moisture Resistant", Height - Seated (Max)="0.016\" (0.40mm)", lastupdated="23/01/2024 8:29:15 PM", Lifecycle Status=Active, Minimum Order=1, Number of Terminations=2, Package / Case="0402 (1005 Metric)", packaging=CutTape, Part Number=RC0402FR-0722K1L, Part Status=Active, partid=2641, price=0.01, series=RC_L, Size / Dimension="0.039\" L x 0.020\" W (1.00mm x 0.50mm)", Supplier 1=DigiKey
S1: library part CMP-1684-00021-1, "Tact Switch, SPST-NO, 0.05 A, -35 to 85 degC, 4-Pin THD, RoHS, Bulk", Actuator Color=Black, Contact Rating @ Voltage=0.05A@24VDC, Dielectric Strength=500VAC, manufacturer="TE Connectivity", Maximum AC Voltage Rating=N/A, Maximum Contact Resistance=100mOhm, Maximum DC Voltage Rating=24V, Minimum Insulation Resistance=100MOhm, Operating Temperature=-35to85C, Package Description="4-Pin Through Hole Device, Body 5.99 x 5.99 mm, Pitch 6.5 mm", Package Reference=THD, Actuator Length=1.4mm, Actuator Material=PolybutyleneTerephthalate, Actuator Style=RoundButton, Base Material=N/A, Body Orientation=Straight, Bushing Type=Unthreaded, Contact Material=CopperAlloy, Contact Plating=Silver, Datasheet URL=http://www.te.com/commerce/DocumentDelivery/DDEController?Action=showdoc&DocId=Customer+Drawing%7F1825910%7FC9%7Fpdf%7FEnglish%7FENG_CD_1825910_C9.pdf%7F1825910-6, Datasheet Version="Rev. C9", Dimension=5.99x5mm, Electrical Life=100000Cycles, Family=1825910, Function=MomentaryContact, Housing Material=N/A, Illumination=N/R, Manufacturer URL=http://www.te.com, Mechanical Life=100000Cycles, Mounting=ThroughHole, packaging=N/A, Part No=1825910-6, Pole Throw Configuration=SPST, Product Weight=N/A, RoHS=Yes, Seal Description=N/A, Seal Location=N/A, Switch Configuration=OFF(ON), Terminal Type=PCPins, Thread Size=N/R
S2: library part CMP-10038-000025-1, "SWITCH SLIDE SPDT 1MA 5V", Actuator Color=Black, Case/Package=SMD/SMT, Contact Current Rating=1mA, Contact Resistance=70mR, Flammability Rating="UL94 V-2", Max Operating Temperature=85°C, Max Voltage Rating (DC)=5V, Min Operating Temperature=-20°C, Package Quantity=1, Actuator Length=1.5mm, Actuator Material=Nylon, Actuator Type=Standard, Contact Material="Copper Alloy", Contact Plating=Silver, Current Rating=1mA, Depth=4.82mm, Electrical Life=15000Cycles, Housing Material=Nylon, Length=7.8mm, Max Current Rating=1mA, Mount="Surface Mount", Orientation="Right Angle", packaging="Tape and Reel", Radiation Hardening=No, REACH SVHC="No SVHC", RoHS Compliant=Yes, series=JS, Switch Function=On-On, Switch Travel=1.5mm, Termination="Gull Wing", Throw Configuration=SPDT, Voltage Rating (DC)=5V
U1: library part CMP-0243-00019-3, "ARM Cortex-M4 32-bit MCU+FPU, 210 DMIPS, 1024 kB Flash, 192 kB Internal RAM, 51 I/Os, 64-pin LQFP, -40 to 85 degC, Tray", I/Os (High Current)=51, manufacturer=STMicroelectronics, Operating Frequency(F) (Processor speed) (MHz)=168, Supply Voltage(Vcc) max (V)=3.6, Supply Voltage(Vcc) min (V)=1.8, componentlink1description="Manufacturer URL", componentlink1url=http://www.st.com/web/en/home.html, componentlink2description=Datasheet, componentlink2url=http://www.st.com/st-web-ui/static/active/en/resource/technical/document/datasheet/DM00037051.pdf, ComponentLink3Description="Package Specification", ComponentLink3URL=http://www.st.com/st-web-ui/static/active/en/resource/technical/document/datasheet/DM00037051.pdf, Core="ARM Cortex-M4", D/A Converter=2x12-bit, DatasheetVersion="Rev. 4", FLASH Size (Prog) (kB)=1024, Internal RAM Size (kB)=192, Mounting Technology="Surface Mount", PackageDescription="64-Pin Low Profile Quad Flat Package, 10 x 10 mm Body, 0.5 mm Pitch", PackageReference=LQFP64, PackageVersion="Rev. 4, 06/2013", Packing=Tray, PartNumber=STM32F405RGT6
U2: "SENSOR HUMID/TEMP 3V I2C 2% SMD", Part Number=HPP845E031R4
U3: "17V Clamp 5A (8/20Âµs) Ipp Tvs Diode Surface Mount SOT-23-6", Package="SOT-23-6 STMicroelectronics", Availability="In Stock", Check_prices=https://www.snapeda.com/parts/USBLC6-2SC6/STMicroelectronics/view-part/?ref=eda, MF=STMicroelectronics, MP=USBLC6-2SC6, price=None, Purchase-URL=https://pricing.snapeda.com/search/part/USBLC6-2SC6/?ref=eda, SnapEDA_Link=https://www.snapeda.com/parts/USBLC6-2SC6/STMicroelectronics/view-part/?ref=snap
U4: library part CMP-209535-000001-1, "LDO Voltage Regulators 1A, 3.3V", Dropout Voltage=1.1V, manufacturer="Advanced Monolithic Systems", Max Junction Temp=+125°C, Max Power Dissipation=1.2W, Max Supply Voltage=15V, Nominal Supply Current=5mA, Output Current=1A, Output Voltage=3.3V, Package=AMS1117, Temperature="-40°C to +125°C", Temperature Range Low=-40°C, Automotive=No, Category=IC, componentlink2description=Datasheet, componentlink2url=http://www.advanced-monolithic.com/pdf/ds1117.pdf, Device Class L1="Integrated Circuits (ICs)", Device Class L2="Power Management ICs", Device Class L3="Voltage Regulators - Linear", Height=1.8mm, Ipc Land Pattern Name=SOT229P700X180-4, Lead Free=Yes, Manufacturer Part Number=AMS1117-3.3, Number of Outputs=1, Octopart=https://octopart.com/ams1117-3.3-advanced+monolithic+systems-25899300, Output Type=Fixed, RoHS=TRUE, Standoff Height=0.64mm, Temperature Range High=+125°C
U5: library part CMP-2000-06859-1, "Single Chip Transceiver, 2.4 GHz, 60 mW, 1.9 to 3.6 V, -40 to 85 degC, 20-Pin QFN, RoHS, Tray", Current - Receiving=12.6mA~13.5mA, Current - Transmitting=7mA~11.3mA, Frequency=2.4GHz, manufacturer="Nordic Semiconductor", Operating Temperature=-40°C~85°C, Package / Case=20-VFQFNExposedPad, Package Description="20-Pin Quad Flat No-lead Package, Body 4 x 4 mm, Pitch 0.5 mm", Package Reference=QFN20, Power - Output=0dBm, Standard Package=490, Voltage - Supply=1.9V~3.6V, Category=RF/IFandRFID, Data Rate (Max)=2Mbps, Datasheet URL=http://www.nordicsemi.com/eng/content/download/2726/34069/file/nRF24L01P_Product_Specification_1_0.pdf, Datasheet Version="Rev. 1.0, 09/2008", Design Resources=DevelopmentToolSelector, Family=RFTransceiverICs, For Use With=1490-1002-ND-KITEVALUATIONNRF24L01P1568-1295-ND-SPARKFUNTRANSCEIVERBREAKOUT-1568-1296-ND-SPARKFUNTRANSCEIVERBREAKOUT-1471-1410-ND-DEVBOARDNRFSCLICKNRF24L01P-MODULE-PCB-ND-KITEVALNRF24L01+PCBANTENNANRF24L01P-MODULE-SMA-ND-KITEVALNRF24L01+SMACONNNRF24L01P-UPGRADE-ND-UPGRADE2PCB/1SMANRF24L01103990038-ND-DEVDUINOSENSORNODEV1.3103990053-ND-DEVDUINOSENSORNODEV2(ATMEGA103990074-ND-DEVDUINOSENSORNODE106990026-ND-ENERGYMONITORSHIELDV2113990088-ND-WIRELESSGATESHIELD113990095-ND-DEVDUINOSENSORNODEV3(ATMEGA106030001-ND-ENERGYMONITORSHIELD1597-1361-ND-DEVDUINOSENSORNODEV2.2(ATMEG105990030-ND-RGBWSTRIPWIRELESSSHIELDV1.0, GPIO=-, Manufacturer URL=http://www.nordicsemi.com/eng/Products/, Memory Size=-, Modulation=GFSK, Mounting Technology=SurfaceMount, Online Catalog=nRF24L01+, Other Names=1490-1019, packaging=Tray, Protocol=-, RF Family/Standard=GeneralISM>1GHZ, Sensitivity=-94dBm, Serial Interfaces=SPI, series=-, Type=TxRxOnly
Y1 Y2: library part CMP-03913-116855757-1, "830108207109 WE-XTAL Quartz Crystal", Frequency=16MHz, Max Operating Temperature=85°C, Min Operating Temperature=-40°C, Height=800µm, Length=3.2mm, NexarPartId=116855757, Width=2.5mm

## Free pads (board coordinates)
  round 150 hole 100: 2(2000,3450) 2(3500,4500)

## Via types
v1: diameter 19.68, hole 7.87, Top Layer to Bottom Layer, tented both sides, 155 vias

## Nets (pads, with @x,y where several pads share a name; then routed paths per layer and width w, separated by ;. In a path a pad name is that pad's centre, name@x,y a point inside that pad or via, vN(x,y) a via of type N, cw(c..) or ccw(c..) an arc to the next point about the centre after c; other vN are vias at no path point)
+3V3: C206.2 C207.2 C208.2 C209.2 C210.2 C211.1 C304.2 C305.2 D201.2 F1.1 J1.1 R101.2 R102.2 S2.3 U1.1 U1.13 U1.19 U1.32 U1.48 U1.64 U2.5 U5.7 U5.15 U5.18 | length 1598.5
  Top Layer w10: v1(2140,3660) C208.2 2142.02,3702.02 2229.18,3702.02 U1.64 ; v1(2200,3640) 2198.66,3638.66 2198.66,3601.34 C209.2 2301.53,3600 2302.36,3600.84 U1.1 ; R101.2 2854.72,4352.1 2860,4357.38 v1(2860,4360) ; v1(2860,4400) U2.5 ; v1(2920,3840) 2921.85,3841.85 2933.86,3841.85 2954.55,3862.54 2954.55,3862.7 2960.32,3868.46 U5.7 ; v1(2940,4500) 2942.62,4500 2946.95,4504.33 S2.3@3011.42,4504.33 ; U5.18 2980.08,4022.91 2980.08,4084.72 C305.2 C304.2 ; U5.15 3052.91,3989.45 3076.83,3989.45 3087.38,4000 v1(3090,4000) ; R102.2 3055.28,4352.65 3060,4357.38 v1(3060,4360) ; J1.1@3500,3550 v1(3500,3590)
  Top Layer w12: v1(2230,4140) 2250,4120 C206.2 2301.53,4090 2302.36,4089.16 U1.48 ; U1.13 2538.58,3566.39 2567.32,3537.65 C210.2 v1(2610,3510) ; v1(2650,4080) 2650,4060 2660,4050 C207.2 2690,3997.73 2689.91,3997.64 U1.32 ; U1.19 2758.27,3741.73 2780,3720 v1(2780,3540) ; v1(2940,4150) C304.2
  other v1: 2760,4340 2720,4380 2760,4420 2720,4460 2760,4500
+5V: C202.2 C203.2 C204.2 FB201.2 U3.5 U4.3 | length 244.6
  Top Layer w10: FB201.2 1999.14,4085 2020,4064.14 2020,4030 2040,4010 2090,4010 2100,4020 U3.5
GND: C101.1 C102.1 C103.1 C104.2 C105.2 C201.1 C202.1 C203.1 C204.1 C205.1 C206.1 C207.1 C208.1 C209.1 C210.1 C211.2 C301.1 C302.2 C303.2 C304.1 C305.1 C307.1 C308.1 C309.1 J1.5 J2.5 J3.2 J3.3 J3.4 J3.5 R105.2 R201.2 R302.2 S2.1 U1.12 U1.18 U1.63 U2.2 U2.7 U3.2 U4.1 U5.8 U5.14 U5.17 U5.20 Y1.2 Y1.4 Y2.2 Y2.4 | length 2204.5
  Top Layer w10: U3.2 2100,3990 2110,4000 v1(2150,4000) ; v1(2140,3780) C208.1 2140.79,3734.65 2153.39,3722.05 U1.63 ; v1(2170,4090) C206.1 ; v1(2230,4170) C101.1 ; C207.1 2690.18,4084.82 2739.82,4084.82 v1(2740,4085) ; v1(2730,3430) 2731.01,3428.99 2731.01,3385.65 C103.1 ; v1(2785,4110) 2785.14,4110.14 2785.14,4179.86 R105.2 ; C102.1 2788.66,3990.55 2788.66,4048.66 v1(2790,4050) ; v1(2820,3690) 2821.34,3688.66 2858.66,3688.66 C303.2 ; R201.2 2848.23,4600 2855.04,4593.19 2855.04,4590.24 2900,4545.28 v1(2900,4500) ; v1(2860,3726.16) 2861.85,3728.01 2884.34,3728.01 2884.47,3728.15 2893.49,3719.13 2919.06,3719.13 Y2.4 ; 2900,4200 2885.35,4185.35 C301.1 2885.35,4066.18 2920,4031.54 2940.55,4031.54 2940.63,4031.46 U5.20 ; v1(2979.84,3840) 2979.92,3840.08 2979.92,3877.09 U5.8 ; U5.17 2999.76,4022.91 2999.76,4042.17 3020,4062.4 C305.1 C304.1 3048.23,4150 3080,4118.23 R302.2 ; Y2.2 3040.95,3620.87 3069.13,3620.87 3080,3610 v1(3100,3610) ; U5.14 3085.36,3969.68 3087.38,3971.7 v1(3090,3971.7) ; C302.2 3101.34,3651.34 3127.6,3651.34 3138.78,3640.16 v1(3140,3640.16) ; v1(3350,3600) 3380,3600 3400,3580 J1.5@3400,3550
  Top Layer w12: 2230,3430 C104.2 ; v1(2270,3470) 2290,3470 2301.87,3458.13 2330.05,3458.13 Y1.2 ; Y1.4 2438.23,3378.5 2466.73,3350 v1(2510,3350) ; C105.2 2513.88,3391.47 2548.53,3391.47 2550,3390 ; U1.12 2518.9,3561.1 2532.68,3547.32 C210.1@2532.68,3510.79 ; U1.18 2717.95,3722.05 2730,3710 2730,3635.02 C211.2
  Top Layer w13.72: C309.1 v1(3280,3850) ; C308.1 v1(3280,3890) ; C307.1 v1(3320,4050)
  Int1 (GND) w10: v1(2979.84,3840) v1@2980,3840
  other v1: 1900,3300 2000,3300 2100,3300 2200,3300 2300,3300 2400,3300 2500,3300 2600,3300 2700,3300 3300,3300 3400,3300 3500,3300 3600,3300 2150,3400 2650,3400 2850,3400 2950,3400 3050,3400 3250,3400 3350,3400 3450,3400 3550,3400 3650,3400 1900,3500 2100,3500 2200,3500 2500,3500 2700,3500 3200,3500 3600,3500 2070,3590 3550,3600 3650,3600 2070,3640 2070,3690 2300,3700 2400,3700 2500,3700 2600,3700 3300,3700 3400,3700 3500,3700 3600,3700 3220,3750 3300,3750 3380,3750 3460,3750 3540,3750 3620,3750 3120,3790 2450,3800 3120,3850 2300,3900 2400,3900 2600,3900 2450,4000 2550,4000 3120,4030 1860,4080 1900,4110 3120,4110 3220,4150 3300,4150 3380,4150 3460,4150 3540,4150 3620,4150 2050,4200 2150,4200 2550,4200 2100,4300 2500,4300 3100,4300 3200,4300 3300,4300 3400,4300 3500,4300 3600,4300 3050,4400 3150,4400 3250,4400 3350,4400 3450,4400 3550,4400 3650,4400 1900,4500 2100,4500 2500,4500 3300,4500 3400,4500 3600,4500 1950,4600 2050,4600 3350,4600 3450,4600 3550,4600 3650,4600
"I2C3 SCL": R101.1 U1.41 U2.6 | length 690.2
  Top Layer w10: U1.41 2440,4070.63 2440,4177.58 2522.42,4260 2880,4260 2893.19,4273.19 2893.19,4293.19 R101.1 U2.6
"I2C3 SDA": R102.1 U1.40 U2.1 | length 753.4
  Top Layer w10: U1.40 2459.84,4147.9 2551.94,4240 2900,4240 2960,4300 R102.1 3010,4357.97 3007.34,4360.63 U2.1
"MCU BOOT0": R103.1 U1.60 | length 1157.8
  Top Layer w12: U1.60 2381.1,3781.1 v1(2620,4020) ; v1(3100,4342.64) R103.1
  Bottom Layer w12: v1(2620,4020) 2920,4320 3077.36,4320 v1(3100,4342.64)
"MCU NRST": J1.3 S1.1 S1.2 U1.7 | length 1731.3
  Top Layer w10: U1.7 2420.47,3593.6 2425.25,3588.82 2425.25,3587.92 2453.17,3560 v1(2480,3560) ; S1.1 S1.2 3091.85,3472.48 3132.48,3472.48 3220,3560 v1(3220,3600) 3220,3660 3240,3680 3400,3680 3450,3630 J1.3@3450,3550
  Bottom Layer w10: v1(2480,3560) 3180,3560 v1(3220,3600)
"MCU OSC IN": C104.1 U1.5 Y1.3 | length 359.2
  Top Layer w10: C104.1 2270.79,3395.35 2287.64,3378.5 Y1.3 2351.61,3378.5 2390,3416.89 2390,3470 2381.1,3478.9 U1.5
"MCU OSC OUT": R104.1 U1.6 | length 131.2
  Top Layer w10: U1.6 2400.79,3530.98 2421.77,3510 R104.1
NetC101_2: C101.2 U1.47 | length 104.5
  Top Layer w12: C101.2 2310,4140.42 2322.05,4128.37 U1.47
NetC102_2: C102.2 U1.31 | length 87.3
  Top Layer w10: U1.31 2742.2,3977.95 2752.68,3988.43 C102.2
NetC103_2: C103.2 S1.3 S1.4 | length 406
  Top Layer w10: C103.2 2735.07,3346.94 2735.07,3302.94 2746.59,3291.42 S1.3 S1.4
NetC205_2: C205.2 F1.2 U4.2 U4.4
NetC303_1: C303.1 R301.1 Y2.1 | length 262.6
  Top Layer w10: C303.1 2922.52,3652.68 Y2.1 2941.61,3638.5 2980,3676.89 2980,3724.14 2971.01,3733.13 2956.87,3733.13 2947.13,3742.87 2947.13,3763.19 2940.32,3770 R301.1
NetD101_1: D101.1 R105.1 | length 70.5
  Top Layer w12: D101.1 R105.1
NetD201_1: D201.1 R201.1 | length 70.5
  Top Layer w12: D201.1 R201.1
NetR103_2: R103.2 S2.2 | length 54.3
  Top Layer w12: R103.2@3100,4450 S2.2@3100,4504.33
"NRF ANT1": L301.1 L303.1 U5.12 | length 107.3
  Top Layer w13.72: U5.12 3052.99,3930.16 3119.84,3930.16 L301.1 L303.1
"NRF ANT2": L301.2 L302.1 U5.13 | length 115.4
  Top Layer w13.72: U5.13 3104.57,3950 L301.2 3155.43,3965.43 L302.1
"NRF CE": U1.25 U5.1 | length 313.8
  Top Layer w10: U1.25 2759.84,3859.84 2770,3870 2770,3910 2849.37,3989.37 U5.1
"NRF CSN": U1.24 U5.2 | length 313.8
  Top Layer w10: U1.24 2770.16,3840.16 2790,3860 2790,3900 2859.68,3969.68 U5.2
"NRF DVDD": C301.2 U5.19 | length 84.3
  Top Layer w10: C301.2 2920,4089.21 2926.81,4082.4 2927.6,4082.4 2960.32,4049.68 U5.19
"NRF INT": U1.20 U5.6 | length 353.2
  Top Layer w10: U1.20 2841.42,3761.42 2880,3800 2880,3860 2897.17,3877.17 U5.6
"NRF IREF": R302.1 U5.16 | length 96
  Top Layer w10: U5.16 3019.37,4029.92 3019.45,4030 3060,4030 3080,4050 R302.1
"NRF PA": C308.2 C309.2 L303.2 U5.11 | length 229
  Top Layer w13.72: U5.11 3079.37,3910.63 3095.43,3894.57 L303.2 ; C309.2 3200,3850.79 3195.05,3855.74 3174.26,3855.74 3160,3870 L303.2 ; C308.2 3197.72,3892.28 3162.28,3892.28 L303.2
"NRF XC1": C302.1 U5.10 Y2.3 | length 259.9
  Top Layer w10: U5.10 3019.37,3705.43 Y2.3 3085.04,3701.5 3099.21,3687.32 C302.1
"NRF XC2": R301.2 U5.9 | length 114.2
  Top Layer w10: R301.2 2982.64,3814.11 2999.69,3831.16 U5.9
"OSC RES": C105.1 R104.2 Y1.1 | length 163.1
  Top Layer w10: Y1.1 Y1.1@2438.23,3441.5 ; R104.2 2470,3473.27 Y1.1@2438.23,3441.5 ; C105.1 2509.21,3430 2497.72,3441.5 Y1.1@2438.23,3441.5
"RF L3-C25": C306.2 L302.2 | length 44.6
  Top Layer w13.72: L302.2 C306.2
"RF SMA": C306.1 C307.2 J3.1 | length 253.6
  Top Layer w13.72: C306.1 C307.2 3400,3970 3420,3950 J3.1
"SPI1 MISO": U1.22 U5.5 | length 282.2
  Top Layer w10: U1.22 2780.79,3800.79 2890.63,3910.63 U5.5
"SPI1 MOSI": U1.23 U5.4 | length 282.6
  Top Layer w10: U1.23 2732.96,3820.47 2733.43,3820 2780,3820 2890.31,3930.31 U5.4
"SPI1 SCK": U1.21 U5.3 | length 381.8
  Top Layer w10: U1.21 2801.1,3781.1 v1(2840,3820) ; v1(2820,3900) 2870,3950 U5.3
  Bottom Layer w10: v1(2820,3900) 2840,3880 v1(2840,3820)
STATUS: D101.2 U1.35 | length 149
  Top Layer w12: U1.35 2558.27,4158.27 2580,4180 D101.2
SWCLK: J1.4 U1.49 | length 1585.2
  Top Layer w10: U1.49 2302.36,3997.64 2380,3920 v1(2440,3920) ; v1(3450,3440) J1.4@3450,3480
  Bottom Layer w10: v1(2440,3920) 2480,3920 2620,3780 2880,3780 2980,3680 3240,3680 3280,3640 3280,3480 3320,3440 v1(3450,3440)
SWDIO: J1.2 U1.46 | length 1551.3
  Top Layer w10: U1.46 2341.73,4034.55 2346.51,4029.77 2346.51,4028.87 2415.16,3960.22 2439.78,3960.22 v1(2440,3960) ; v1(3500,3440) J1.2@3500,3480
  Bottom Layer w10: v1(2440,3960) 2480,3960 2640,3800 2900,3800 3000,3700 3260,3700 3300,3660 3300,3540 3320,3520 3357.27,3520 3417.27,3460 3480,3460 v1(3500,3440)
SWO: J1.6 U1.55 | length 1514.9
  Top Layer w10: U1.55 2229.76,3879.76 2439.76,3879.76 v1(2440,3880) ; v1(3400,3420) J1.6@3400,3480
  Bottom Layer w10: v1(2440,3880) 2480,3880 2600,3760 2858.06,3760 2958.06,3660 3220,3660 3260,3620 3260,3460 3300,3420 v1(3400,3420)
USB_D_ESD_N: J2.2 U3.1 | length 261
  Top Layer w10: J2.2 2006.02,3782.72 2035.87,3782.72 2038.79,3779.8 2047.08,3779.8 2093,3825.72 2093,3921.91 2087.14,3927.77 2083.21,3927.77 2062.6,3948.39 U3.1
USB_D_ESD_P: J2.3 U3.3 | length 284.2
  Top Layer w10: J2.3 2006.02,3762.87 2035.87,3762.87 2038.79,3765.8 2052.88,3765.8 2107,3819.92 2107,3921.91 2112.86,3927.77 2116.79,3927.77 2137.4,3948.39 U3.3
USB_D_N: U1.44 U3.6 | length 529.1
  Top Layer w10: U3.6 2062.6,4071.61 2083.21,4092.23 2087.14,4092.23 2093,4098.09 2093,4112.17 2204.83,4224 2335.8,4224 2369.9,4189.9 2378.26,4181.54 2378.26,4109.24 2381.1,4106.4 U1.44
USB_D_P: U1.45 U3.4 | length 482.7
  Top Layer w10: U3.4 2137.4,4071.61 2116.79,4092.23 2112.86,4092.23 2107,4098.09 2107,4106.37 2210.63,4210 2330,4210 2364.26,4175.74 2364.26,4109.24 2361.42,4106.4 U1.45
USB_ID: J2.4 U1.43 | length 710.9
  Top Layer w10: J2.4 2074.41,3734.41 v1(2100,3760) ; v1(2400,4140) 2400.44,4139.56 2400.44,4070.82 U1.43
  Bottom Layer w10: v1(2100,3760) 2120,3780 2120,3910 2350,4140 v1(2400,4140)
VBUS: C201.2 FB201.1 J2.1
pads on no net: J1. J2.6 J2.7 J2.8 J2.9 J2.10 J2.11 S2. S2.4 S2.5 U1.2 U1.3 U1.4 U1.8 U1.9 U1.10 U1.11 U1.14 U1.15 U1.16 U1.17 U1.26 U1.27 U1.28 U1.29 U1.30 U1.33 U1.34 U1.36 U1.37 U1.38 U1.39 U1.42 U1.50 U1.51 U1.52 U1.53 U1.54 U1.56 U1.57 U1.58 U1.59 U1.61 U1.62 U2.3 U2.4 U5.21
copper on no net:
  other v1: 2958.35,3928.35 3001.65,3928.35 2958.35,3971.65 3001.65,3971.65

## Polygon pours and split planes (outlines as drawn)
GND on Top Layer "NONET_L01_P-001" (solid, pour order 25): 3100,3550 3200,3450 3200,3200 1800,3200 1800,3550 2100,3550 2150,3600 2650,3600 2700,3650 2800,3650 2800,3600 2850,3550
GND on Top Layer "NONET_L01_P-001" (solid, pour order 26): 3100,4200 3050,4150 2900,4150 2850,4200 2850,4700 3700,4700 3700,4200
GND on Top Layer "NONET_L01_P-001" (solid, pour order 21): 1860,4380 1840,4400 1840,4560 1940,4660 2200,4660 2210,4650 2210,4430 2190,4410 2000,4410 1970,4380
NetC205_2 on Top Layer "NONET_L01_P-001" (solid, pour order 20): 2220,4660 2210,4650 2210,4430 2190,4410 2000,4410 1990,4400 1990,4360 2000,4350 2110,4350 2180,4280 2420,4280 2440,4300 2440,4640 2420,4660
+5V on Top Layer "NONET_L01_P-001" (solid, pour order 18): 1930,4060 1920,4070 1920,4260 1900,4280 1860,4280 1840,4300 1840,4360 1860,4380 1960,4380 1980,4360 1980,4330 2000,4310 2040,4310 2050,4300 2050,4280 2040,4270 2000,4270 1980,4250 1980,4070 1970,4060
GND on Top Layer "NONET_L01_P-001" (solid, pour order 19): 1840,3950 1850,3940 1910,3940 1920,3950 1920,4260 1900,4280 1860,4280 1840,4260
VBUS on Top Layer "NONET_L01_P-001" (solid, pour order 12): 2000,4040 1990,4050 1930,4050 1920,4040 1920,3930 1940,3910 1940,3820 1960,3800 2050,3800 2080,3830 2080,3890 2000,3970
+3V3 on Top Layer "NONET_L01_P-001" (solid, pour order 6): 2720,4540 2780,4540 2820,4500 2820,4340 2780,4300 2600,4300 2560,4340 2560,4620 2600,4660 2660,4660 2680,4640 2680,4580
GND on Top Layer "NONET_L01_P-001" (solid, pour order 11): 1950,3720 1940,3710 1940,3590 1960,3570 2080,3570 2100,3590 2100,3710 2090,3720
GND on Top Layer "NONET_L01_P-001" (solid, pour order 0): 3100,3790 ccw(c3160,3790) 3160,3730 3700,3730 3700,3770 3160,3770 cw(c3160,3790) 3140,3790 3140,3870 3100,3870
GND on Top Layer "NONET_L01_P-001" (solid, pour order 1): 3160,4170 ccw(c3160,4110) 3100,4110 3100,4010 3140,4010 3140,4110 cw(c3160,4110) 3160,4130 3700,4130 3700,4170
no net on Top Overlay "NONET_L01_P-001" (solid): 3560,4220 3660,4320 3550,4320 3550,4220
no net on Top Overlay "NONET_L01_P-001" (solid): 3160,4320 3170,4320 3170,4220 3060,4220
GND on Int1 (GND) "NONET_L01_P-001" (solid, pour order 22): 1800,4700 1800,3200 3700,3200 3700,4700
GND on Bottom Layer "NONET_L01_P-001" (solid, pour order 24): 1800,3200 3700,3200 3700,4700 1800,4700
+3V3 on Int2 (PWR) "NONET_L01_P-001" (solid, pour order 23): 1800,4700 1800,3200 3700,3200 3700,4700

## Other copper
Top Layer:
  pour cut-out: 2360,3680 2420,3680 2420,3580 2460,3540 2520,3540 2520,3460 2540,3440 2540,3340 2520,3320 2260,3320 2240,3340 2240,3480 2260,3500 2340,3500 2360,3520

## Silkscreen, mask and mechanical layers (free items; w line width, h text height)
Top Overlay:
  circle w10: c2000,3450 r85
  circle w10: c3500,4500 r85
  lines w8: 2606.54,4146.54 2423.46,4146.54 2420,4150 2420,4160 2420,4210 2423.46,4213.46 2606.54,4213.46 ; 2672.44,4568.5 2481.5,4568.5 2480,4570 2480,4630 2481.5,4631.5 2672.44,4631.5 ; 3100,3850 3100,3775 ccw(c3150,3775) 3150,3725 3680,3725 ; 3100,4025 3100,4125 cw(c3150,4125) 3150,4175 3175,4175 3680,4175
  lines w10: 3231.89,4497.48 3260,4469.37 3260,4410 ; 3260,4410 3430,4410 3430,4350 3260,4350 3260,4410
  text "LOAD" at 2968.75,4607.42 h40
  text "RUN" at 3105,4607.42 h40
  text "+3V3" at 2479.35,4569.66 h60
  text "BOOT" at 3260,4350 h60
  text "PROTO RF" at 3160,4220 h80
  text "STAT" at 2420,4150 h60
  text "RESET" at 2877.17,3497.91 h50
  text "SWD" at 3255,3325 h60
Bottom Overlay:
  circle w10: c3500,4500 r85
  circle w10: c2000,3450 r85
  lines w8: 1820,3580 2080,3580 2140,3580 2180,3620 ; 1820,3940 1980,3940 2020,3980 2020,4040 2020,4180 2040,4200 ; 1820,4360 1980,4360 2000,4340 2000,4300 2040,4260 ; 2180,3840 2180,4060 2180,4180 2160,4200 2040,4200 ; 2360,4120 2360,4180 2320,4220 2140,4220 2120,4200 2100,4200 2140,4240 2320,4240 2380,4180 2380,4120 ; 2380,4680 2380,4580 ; 2440,4120 2440,4180 2520,4260 2880,4260 2900,4280 ; 2460,4120 2460,4160 2540,4240 2900,4240 2940,4280 ; 2500,4120 2500,4160 2560,4220 2880,4220 ; 2675,3595 2680,3590 2730,3540 ; 2690,3610 2740,3560 3260,3560 ; 2705,3625 2710,3620 2750,3580 2760,3580 2780,3580 3200,3580 3260,3580 ; 2720,3760 2800,3760 2880,3840 ; 2720,3780 2790,3780 2865,3855 ; 2720,3800 2780,3800 2850,3870 ; 2720,3820 2770,3820 2835,3885 ; 2720,3840 2760,3840 2820,3900 ; 2720,3860 2750,3860 2760,3870 2820,3930 ; 2820,4120 2740,4120 2640,4120 ; 2820,4220 2820,3900 ; 2820,4320 2820,4280 ; 2820,4480 3280,4480 ; 2820,4540 2480,4540 2440,4580 2380,4580 ; 2820,4680 2820,4280 ; 2840,4220 2880,4220 ; 3120,3740 3180,3740 3300,3740 ; 3120,3820 3120,3810 2910,3810 ; 3240,4480 3280,4480 ; 3260,3540 2730,3540 ; 3280,4680 3280,4480 ; 3300,4100 3300,4160 ; 3680,3740 3300,3740 ; 3680,4160 3300,4160 ; 2040,4200 2040,4260 ; 2040,4260 2320,4260 2340,4280 ; 2180,3620 2220,3580 ; 2180,3620 2180,3668 2180,4040 2260,4120 2640,4120 ; 2220,3580 2220,3380 2230,3370 2280,3320 2560,3320 2660,3420 2660,3560 2660,3580 ; 2220,3580 2300,3580 2660,3580 ; 2340,4280 2820,4280 ; 2340,4280 2340,4540 2380,4580 ; 2640,4120 2720,4040 2720,3640 2660,3580 ; 2730,3540 2730,3510 2760,3480 ; 2760,3480 2760,3460 2760,3250 3150,3250 3200,3300 3200,3520 2800,3520 2760,3480 ; 2820,3900 2910,3810 ; 2820,4280 3240,4280 3280,4320 3280,4480 ; 2880,4220 3060,4220 3120,4160 ; 2910,3810 2820,3720 2820,3640 2860,3600 3120,3600 3120,3860 3120,4160 ; 3120,4160 3300,4160 ; 3300,3740 3300,4160 ; 3260,3440 3260,3600 3300,3640 3600,3640 3640,3600 3640,3440 3600,3400 3300,3400 3260,3440
  text "POWER / LED" at 2820,4540 h60
  text "BOOT /  / SELECT" at 3280,4480 h60
  text "VOLTAGE / REGULATOR" at 2340,4420 h60
  text "FILTER" at 2000,4360 h60 r90
  text "FUSE" at 2820,4280 h60
  text "TEMPERATURE / SENSOR" at 3260,4260 h60
  text "ANTENNA" at 3400,4170 h60 r90
  text "IMPEDANCE / MATCHING" at 3300,4160 h60 r90
  text "STATUS / LED" at 2860,4120 h60
  text "NRF / IC" at 3120,3820 h60
  text "USB" at 2180,3580 h60
  text "MICRO / CONTROLLER / UNIT" at 2720.3,3580 h60
  text "NRF / CRYSTAL" at 3160,3580 h60
  text "SWD" at 3640,3400 h60
  text "MCU / CRYSTAL" at 2640,3320 h60
  text "RESET / SWITCH" at 3200,3250 h60
Mechanical 1:
  the board outline again, w10

## Text inside footprints (layer, text, board x,y; h text height)
J2: Mechanical 1 "PCB EDGE" at 1835.83,4043.46 h11.81 r270